# Altium PCB FSAEeBR-energy-meter.PcbDoc
Units mm, origin at the board's own origin, x right, y up, seen from the top; angles counter-clockwise.
Board outline 152.4 x 101.6 mm, 2 copper layers (Top Layer, Bottom Layer), stack 1.631 mm thick; 98 components, 74 nets, 420 pads, 3 vias.
Unrouted connection lines stored in the file: 241.
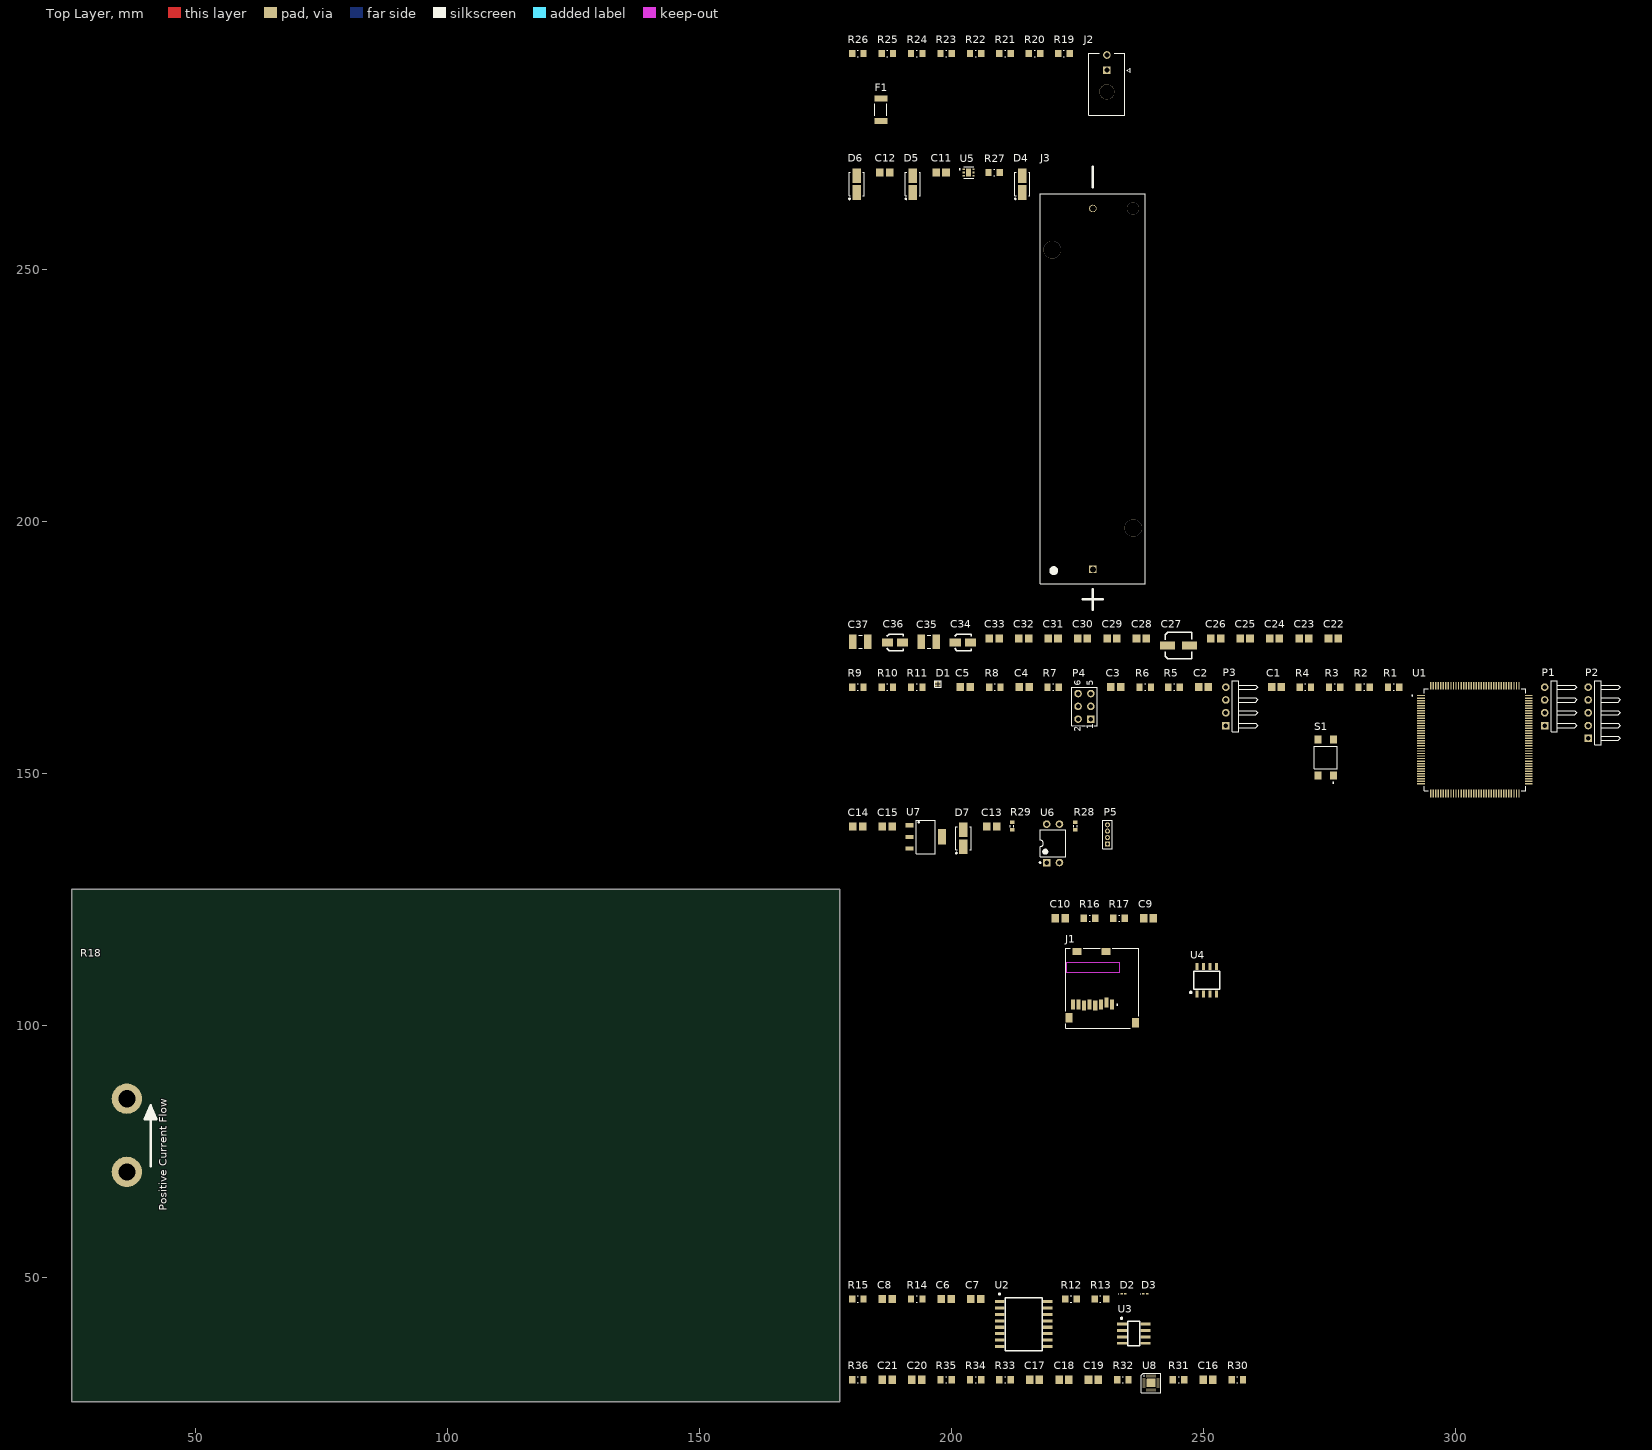
[diagram p0: Top Layer view]
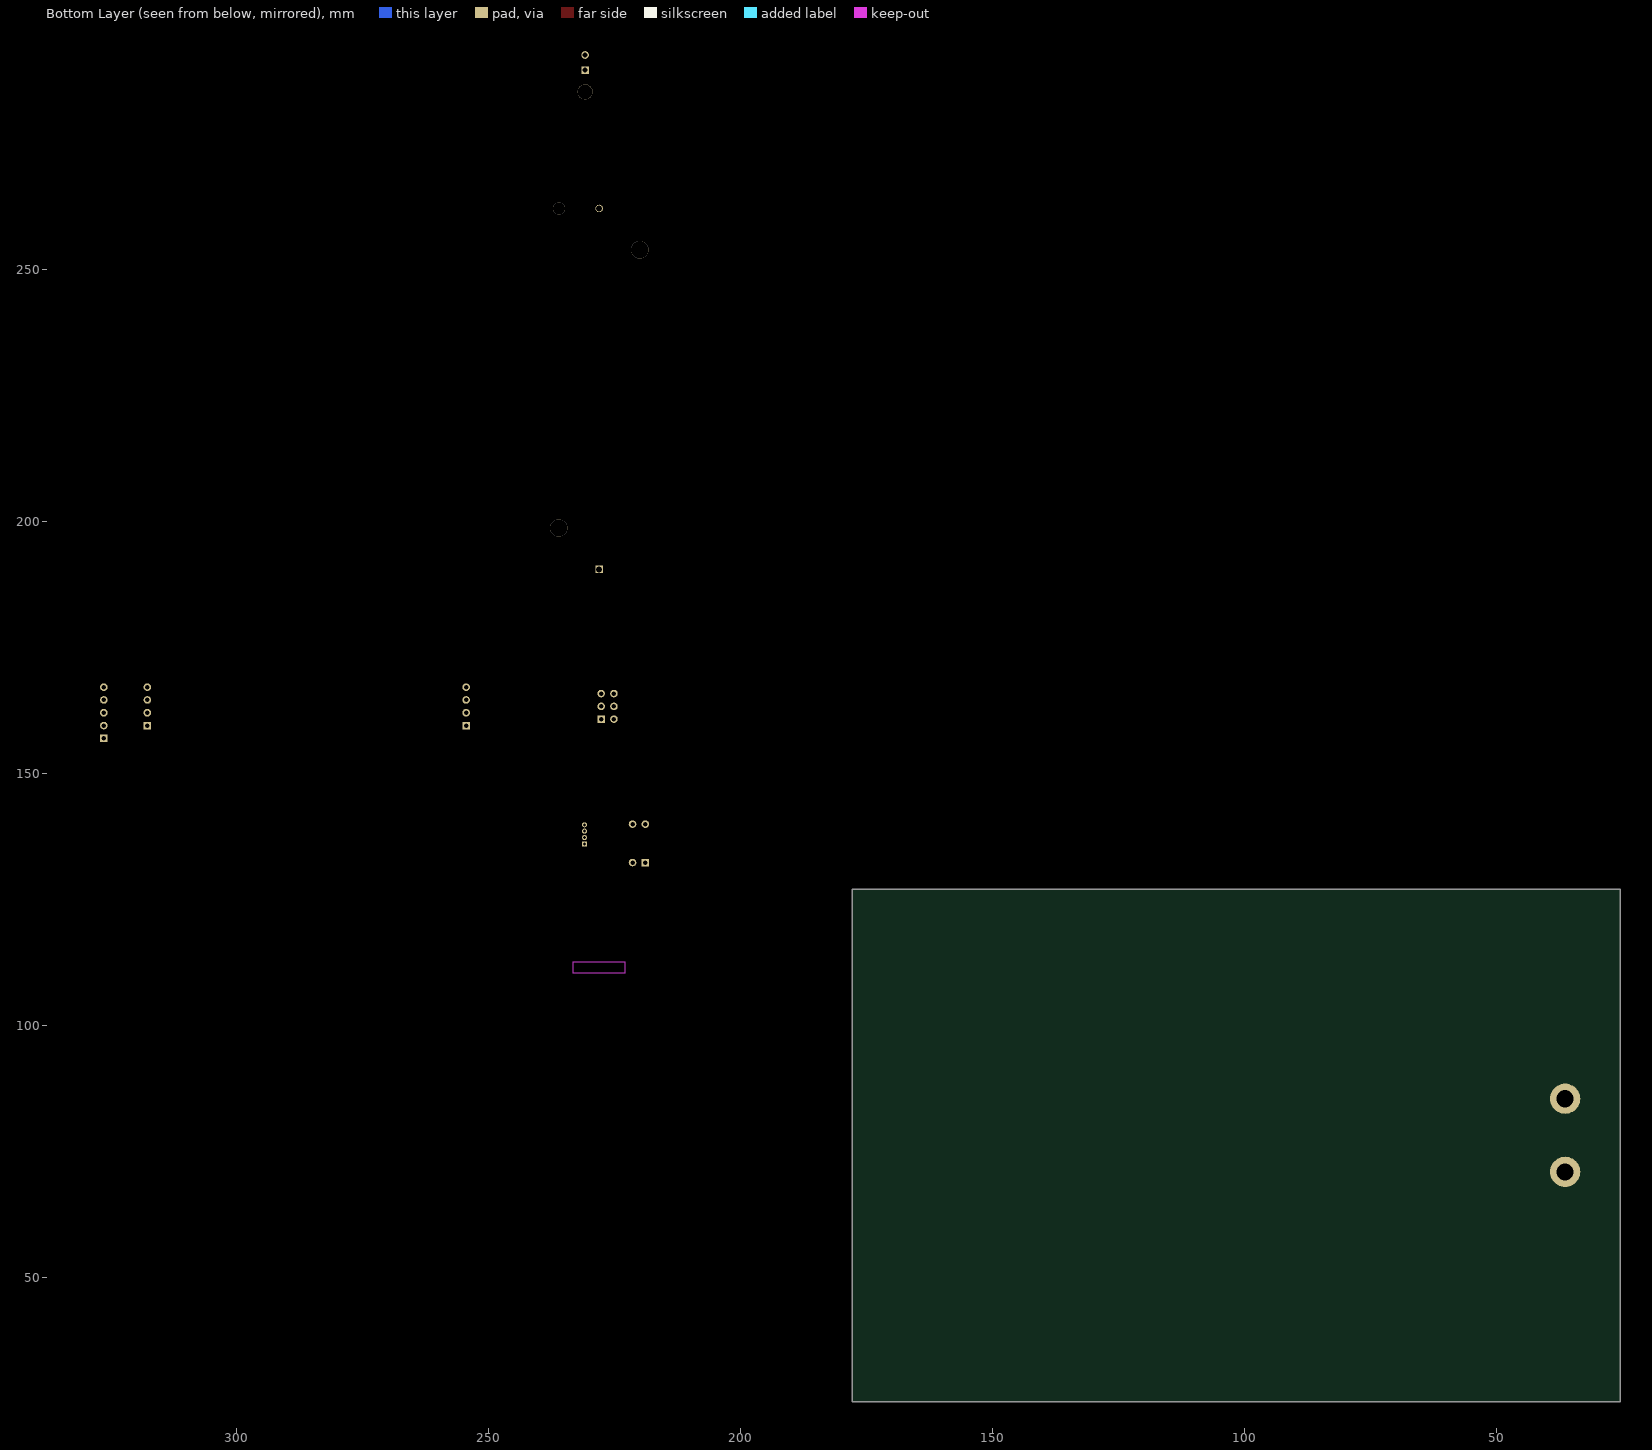
[diagram p1: Bottom Layer view, seen from below]

## Layer stack, top to bottom
Top Solder: solder mask 0.0102, Solder Resist, Dk 3.5
Top Layer: signal copper 0.0356
Dielectric 1: dielectric 1.56, FR-4, Dk 4.8
Bottom Layer: signal copper 0.0356
Bottom Solder: solder mask 0.0102, Solder Resist, Dk 3.5

## Board outline
25.4,25.4 177.8,25.4 177.8,127 25.4,127

## Design rules (kind name [scope] priority, off if disabled: settings)
Clearance [All] p1: gap=0.152 ignorepadtopadclearanceinfootprint=FALSE
PolygonConnect [All] p1: connectstyle=Relief reliefconductorwidth=0.254 reliefentries=4 polygonreliefangle="90 Angle" airgapwidth=0.254
RoomDefinition voltage_sensing [InComponentClass('voltage_sensing')] p1: confinementstyle=ConfineIn formatcopy=TRUE lockcomponents=FALSE outline 178.943,274.574 241.427,274.574 241.427,296.926 178.943,296.926
RoomDefinition power [InComponentClass('power')] p2: confinementstyle=ConfineIn formatcopy=TRUE lockcomponents=FALSE outline 178.943,182.118 238.76,182.118 238.76,273.304 178.943,273.304
RoomDefinition MCU_power_input [InComponentClass('MCU_power_input')] p3: confinementstyle=ConfineIn formatcopy=TRUE lockcomponents=FALSE outline 178.943,172.466 278.257,172.466 278.257,180.848 178.943,180.848
RoomDefinition MCU [InComponentClass('MCU')] p4: confinementstyle=ConfineIn formatcopy=TRUE lockcomponents=FALSE outline 178.943,144.78 332.867,144.78 332.867,171.196 178.943,171.196
RoomDefinition LV_power [InComponentClass('LV_power')] p5: confinementstyle=ConfineIn formatcopy=TRUE lockcomponents=FALSE outline 178.943,131.318 233.172,131.318 233.172,143.51 178.943,143.51
RoomDefinition log_storage [InComponentClass('log_storage')] p6: confinementstyle=ConfineIn formatcopy=TRUE lockcomponents=FALSE outline 219.075,97.282 269.984,97.282 269.984,125.349 219.075,125.349
RoomDefinition CAN_interface [InComponentClass('CAN_interface')] p7: confinementstyle=ConfineIn formatcopy=TRUE lockcomponents=FALSE outline 178.943,35.052 240.665,35.052 240.665,49.784 178.943,49.784
RoomDefinition ADC [InComponentClass('ADC')] p8: confinementstyle=ConfineIn formatcopy=TRUE lockcomponents=FALSE outline 178.943,25.781 259.207,25.781 259.207,33.782 178.943,33.782
RoutingVias [All] p1: holewidth=0.711 width=1.27 viastyle="Through Hole" minholewidth=0.711 minwidth=1.27 maxholewidth=0.711 maxwidth=1.27
SolderMaskExpansion [All] p1: expansion=0.102 istentingtop=FALSE
Width [All] p1: maxlimit=0.254 minlimit=0.254 preferedwidth=0.254
30 further rules are at their usual default settings.

## Classes and differential pairs
component class voltage_sensing: F1 F? J2 R19 R20 R21 R22 R23 R24 R25 R26
component class power: C11 C12 D4 D5 D6 J3 R27 U5
component class MCU: C1 C2 C3 C4 C5 D1 P1 P2 P3 P4 R1 R2 R3 R4 R5 R6 R7 R8 R9 R10 R11 S1 S? U1
component class MCU_power_input: C22 C23 C24 C25 C26 C27 C28 C29 C30 C31 C32 C33 C34 C35 C36 C37
component class LV_power: C13 C14 C15 D7 P5 R28 R29 U6 U7
component class log_storage: C9 C10 J1 R16 R17 U4
component class current_sensing: R18
component class CAN_interface: C6 C7 C8 D2 D3 R12 R13 R14 R15 U2 U3
component class ADC: C16 C17 C18 C19 C20 C21 R30 R31 R32 R33 R34 R35 R36 U8

## Components (designator, comment, footprint, x,y, rotation, side; value= is the part's Value field where it differs from the comment)
C1 "Cap" CAPC2012X09M 264.414,167.132 r0 top value=100pF
C2 "Cap" CAPC2012X09M 249.936,167.132 r0 top value=100pF
C3 "Cap" CAPC2012X09M 232.537,167.132 r0 top value=100pF
C4 "CAP CER 50v X7R 0805" CAPC2012X09M 214.376,167.132 r0 top value=.1uF
C5 "Cap" CAPC2012X09M 202.692,167.132 r0 top value=100pF
C6 "Cap" CAPC2012X09M 198.882,45.72 r0 top value=.22uF
C7 "Cap" CAPC2012X09M 204.724,45.72 r0 top value=.22uF
C8 "Cap" CAPC2012X09M 187.198,45.72 r0 top value=.22uF
C9 "Cap" CAPC2012X09M 239.014,121.285 r0 top value=.1uF
C10 "Cap" CAPC2012X09M 221.488,121.285 r0 top value=.1uF
C11 "Cap" CAPC2012X09M 197.866,269.24 r0 top value=1.2uF
C12 "Cap" CAPC2012X09M 186.69,269.24 r0 top value=1.2uF
C13 "Cap" CAPC2012X09M 207.899,139.446 r0 top value=100pF
C14 "Cap" CAPC2012X09M 181.356,139.446 r0 top value=1.2uF
C15 "Cap" CAPC2012X09M 187.198,139.446 r0 top value=1.2uF
C16 "Cap" CAPC2012X09M 250.825,29.718 r0 top value=100pF
C17 "Cap" CAPC2012X09M 216.408,29.718 r0 top value=100pF
C18 "Cap" CAPC2012X09M 222.25,29.718 r0 top value=.22uF
C19 "Cap" CAPC2012X09M 228.092,29.718 r0 top value=.22uF
C20 "Cap" CAPC2012X09M 193.04,29.718 r0 top value=.22uF
C21 "Cap" CAPC2012X09M 187.198,29.718 r0 top value=100pF
C22 "CAP CER 50v X7R 0805" CAPC2012X09M 275.717,176.784 r0 top value=.1uF
C23 "CAP CER 50v X7R 0805" CAPC2012X09M 269.875,176.784 r0 top value=.1uF
C24 "CAP CER 50v X7R 0805" CAPC2012X09M 264.033,176.784 r0 top value=.1uF
C25 "CAP CER 50v X7R 0805" CAPC2012X09M 258.191,176.784 r0 top value=.1uF
C26 "CAP CER 50v X7R 0805" CAPC2012X09M 252.349,176.784 r0 top value=.1uF
C27 "Cap Pol" CAPACITOR_5MM 244.983,175.387 r0 top value=4.7uF
C28 "CAP CER 50v X7R 0805" CAPC2012X09M 237.617,176.784 r0 top value=.1uF
C29 "CAP CER 50v X7R 0805" CAPC2012X09M 231.775,176.784 r0 top value=.1uF
C30 "CAP CER 50v X7R 0805" CAPC2012X09M 225.933,176.784 r0 top value=.1uF
C31 "CAP CER 50v X7R 0805" CAPC2012X09M 220.091,176.784 r0 top value=.1uF
C32 "CAP CER 50v X7R 0805" CAPC2012X09M 214.249,176.784 r0 top value=.1uF
C33 "CAP CER 50v X7R 0805" CAPC2012X09M 208.407,176.784 r0 top value=.1uF
C34 "Cap Pol" CAPACITOR_3MM 202.184,176.022 r0 top value=1uF
C35 "CAP CER 1kv X7R 1210" CAPC3225X25M 195.453,176.149 r0 top value=10nF
C36 "Cap Pol" CAPACITOR_3MM 188.722,176.022 r0 top value=1uF
C37 "CAP CER 1kv X7R 1210" CAPC3225X25M 181.864,176.149 r0 top value=10nF
D1 "RGB LED" SML-LX0303RGBC1TR 197.231,167.767 r0 top
D2 "LED" 0603 234.061,46.736 r0 top
D3 "LED" 0603 238.379,46.736 r0 top
D4 "DIODE SCHOTTKY 40V 2A SMA" DIOM4326X23M 213.995,266.954 r90 top
D5 "DIODE SCHOTTKY 40V 2A SMA" DIOM4326X23M 192.278,266.954 r90 top
D6 "DIODE SCHOTTKY 40V 2A SMA" DIOM4326X23M 181.102,266.954 r90 top
D7 "DIODE SCHOTTKY 40V 2A SMA" DIOM4326X23M 202.311,137.16 r90 top
F1 "FUSE" 12Z-2010 185.928,281.686 r90 top
J1 "MEM2061-01-188-00-A" GCT_MEM2061-01-188-00-A_REVA 229.817,107.365 r0 top
J2 "43045-0200" MOLEX_43045-0200 230.759,289.56 r0 top
J3 "1043P" CONN2_1043P_KEY 227.965,190.5 r90 top
P1 "Header 4H" HDR1X4H 317.627,159.512 r90 top
P2 "Header 5H" HDR1X5H 326.263,156.972 r90 top
P3 "Header 4H" HDR1X4H 254.381,159.512 r90 top
P4 "Header 3X2" HDR2X3 227.584,160.782 r90 top
P5 "MHDR1X4" MHDR1X4 230.886,136.017 r90 top
R1 "Res3" RESC2112X05M 287.655,167.132 r0 top value=1.00K
R2 "Res3" RESC2112X05M 281.813,167.132 r0 top value=1.00K
R3 "Res3" RESC2112X05M 275.971,167.132 r0 top value=4.75K
R4 "Res3" RESC2112X05M 270.129,167.132 r0 top value=4.75K
R5 "Res3" RESC2112X05M 244.094,167.132 r0 top value=1.00K
R6 "Res3" RESC2112X05M 238.379,167.132 r0 top value=1.00K
R7 "Res3" RESC2112X05M 220.091,167.132 r0 top value=10.0K
R8 "Res3" RESC2112X05M 208.534,167.132 r0 top value=10.0K
R9 "Res3" RESC2112X05M 181.356,167.132 r0 top value=1.00K
R10 "Res3" RESC2112X05M 187.198,167.132 r0 top value=1.00K
R11 "Res3" RESC2112X05M 193.04,167.132 r0 top value=1.00K
R12 "Res3" RESC2112X05M 223.647,45.72 r0 top value=1.00K
R13 "Res3" RESC2112X05M 229.489,45.72 r0 top value=1.00K
R14 "Res3" RESC2112X05M 193.04,45.72 r0 top value=10.0K
R15 "Res3" RESC2112X05M 181.356,45.72 r0 top value=10.0K
R16 "Res3" RESC2112X05M 227.33,121.285 r0 top value=10.0K
R17 "Res3" RESC2112X05M 233.172,121.285 r0 top value=10.0K
R18 "SH6918F500BHEP" SH6918F500BHEP 36.322,78.221 r90 top value=0.0001
R19 "Res3" RESC2112X05M 222.25,292.862 r0 top value=63.4K
R20 "Res3" RESC2112X05M 216.408,292.862 r0 top value=63.4K
R21 "Res3" RESC2112X05M 210.566,292.862 r0 top value=63.4K
R22 "Res3" RESC2112X05M 204.724,292.862 r0 top value=63.4K
R23 "Res3" RESC2112X05M 198.882,292.862 r0 top value=63.4K
R24 "Res3" RESC2112X05M 193.04,292.862 r0 top value=63.4K
R25 "Res3" RESC2112X05M 187.198,292.862 r0 top value=63.4K
R26 "Res3" RESC2112X05M 181.356,292.862 r0 top value=73.2R
R27 "Res3" RESC2112X05M 208.407,269.24 r0 top value=0.1
R28 "Res3" J1-0603 224.536,139.573 r90 top value=3.4k
R29 "Res3" J1-0603 211.963,139.573 r90 top value=3.4k
R30 "Res3" RESC2112X05M 256.667,29.718 r0 top value=10.0K
R31 "Res3" RESC2112X05M 244.983,29.718 r0 top value=10.0K
R32 "Res3" RESC2112X05M 233.934,29.718 r0 top value=10.0K
R33 "Res3" RESC2112X05M 210.566,29.718 r0 top value=10.0K
R34 "Res3" RESC2112X05M 204.724,29.718 r0 top value=10.0K
R35 "Res3" RESC2112X05M 198.882,29.718 r0 top value=10.0K
R36 "Res3" RESC2112X05M 181.356,29.718 r0 top value=10.0K
S1 "TL3305AF160QG" SW_TL3305AF160QG 274.193,153.162 r90 top
U1 "STM32F103ZCT6TR" QFP50P2200X2200X160-144N 303.784,156.718 r0 top
U2 "ISO7721FBDWR" DW0016B_N 214.249,40.767 r0 top
U3 "MCP2551T-I/SN" SOIC127P600X175-8N 236.093,38.862 r0 top
U4 "M95M02-DRMN6TP" SOIC8-1.27-5X4MM 250.571,108.966 r0 top
U5 "TLV75730PDRVR" VREG_TLV75730PDRVR 203.327,269.24 r0 top
U6 "Optoisolator1" DIP-4 220.091,136.144 r90 top
U7 "MCP1799T-5002H/DB" SOT223 194.818,137.414 r0 top
U8 "ADS131M03IRUKR" 20-WQFN 239.522,29.083 r0 top

## Footprints (in the part's own frame and the unit in brackets; to place one, negate y for a bottom-side part, rotate by r counter-clockwise, add the part's x,y. Pads: shape width x height; smd on the part's side, far side on the other; paste and mask are expansions set on the pad)
12Z-2010 [mm] "Chip Resistor, Body 5.0x2.5mm, IPC High Density"
  rect 1.2x2.6 smd: 1(-2.2,0) 2(2.2,0)
  silkscreen extent -1.2,-1.2 1.2,1.2, body extent -2.58,-1.33 2.58,1.33, height 0.9
20-WQFN [mm]
  rrect40% 0.6x0.2 smd mask+0.05: 1(-1.4,0.8) 2(-1.4,0.4) 3(-1.4,0) 4(-1.4,-0.4) 5(-1.4,-0.8) 11(1.4,-0.8) 12(1.4,-0.4) 13(1.4,0) 14(1.4,0.4) 15(1.4,0.8)
  rrect40% 0.2x0.6 smd mask+0.05: 6(-0.8,-1.4) 7(-0.4,-1.4) 8(0,-1.4) 9(0.4,-1.4) 10(0.8,-1.4) 16(0.8,1.4) 17(0.4,1.4) 18(0,1.4) 19(-0.4,1.4) 20(-0.8,1.4)
  rrect5% 1.7x1.7 smd mask+0.05: EXP(0,0)
  silkscreen extent -1.91,-1.91 1.91,1.91, body extent -1.55,-1.55 1.55,1.55, height 0.6
0603 [mm] "Chip Inductor, Body 0.6x0.3mm, IPC High Density"
  rect 0.5x0.3 smd: 1(-0.35,0) 2(0.35,0)
  silkscreen extent -0.9,-0.05 -0.9,0.05, body extent -0.33,-0.18 0.33,0.18, height 0.55
CAPACITOR_3MM [mm]
  rect 2.2x1.6 smd: 1(-1.5,0) 2(1.5,0)
  silkscreen extent -1.65,-1.65 1.65,1.65, body extent -2.6,-2.15 2.6,2.15, height 6.15
CAPACITOR_5MM [mm]
  rect 3x1.6 smd: 1(-2.2,0) 2(2.2,0)
  silkscreen extent -2.65,-2.65 2.65,2.65, body extent -3.1,-2.65 3.1,2.65, height 6.15
CAPC2012X09M [mm] "Chip Capacitor, 2-Leads, Body 2.00x1.25mm, IPC Low Density"
  rect 1.5x1.6 smd: 1(-0.975,0) 2(0.975,0)
  body extent -1.1,-0.72 1.1,0.72, height 0.88
CAPC3225X25M [mm] "Chip Capacitor, 2-Leads, Body 3.20x2.50mm, IPC Low Density"
  rect 1.5x2.8 smd: 1(-1.5,0) 2(1.5,0)
  silkscreen extent -0.35,-1.3 0.35,1.3, body extent -1.7,-1.35 1.7,1.35, height 2.5
CONN2_1043P_KEY [mm]
  rect 1.49x1.49 hole 1.19 mask+0: 1(0,0)
  round 1.49 hole 1.19 mask+0: 2(71.6,0)
  silkscreen extent -7.97,-10.45 79.85,10.45, body extent -2.62,-10.33 74.43,10.33, height 14.86
DIOM4326X23M [mm] "Molded Diode, 2-Leads, Body 4.30x2.60mm, IPC Low Density"
  rect 2.9x1.7 smd: 1(-1.675,0) 2(1.675,0)
  silkscreen extent -3.07,-1.5 2.3,1.52, body extent -2.74,-1.4 2.74,1.4, height 2.36
DIP-4 [mm] "DIP; 4 Leads; Row Spacing 7.62 mm; Pitch 2.54 mm"
  rect 1.5x1.5 hole 0.9: 1(-3.81,1.27)
  round 1.5 hole 0.9: 2(-3.81,-1.27) 3(3.81,-1.27) 4(3.81,1.27)
  silkscreen extent -3.93,-2.55 2.65,2.69, body extent -3.15,-2.5 3.15,2.5, height 5.6
DW0016B_N [mm]
  rect 1.9x0.6 smd paste+0 mask+0: 1(-4.75,4.445) 2(-4.75,3.175) 3(-4.75,1.905) 4(-4.75,0.635) 5(-4.75,-0.635) 6(-4.75,-1.905) 7(-4.75,-3.175) 8(-4.75,-4.445) 9(4.75,-4.445) 10(4.75,-3.175) 11(4.75,-1.905) 12(4.75,-0.635) 13(4.75,0.635) 14(4.75,1.905) 15(4.75,3.175) 16(4.75,4.445)
  silkscreen extent -4.86,-5.25 3.65,6.07, body extent -5.17,-5.15 5.17,5.15, height 2.59
GCT_MEM2061-01-188-00-A_REVA [mm]
  rect 0.8x2 smd: 1(1.94,-3.225) 2(0.84,-2.825) 3(-0.26,-3.225) 4(-1.36,-3.425) 5(-2.46,-3.225) 6(-3.56,-3.425) 7(-4.66,-3.225) 8(-5.76,-3.225)
  rect 1.8x1.4 smd: 9(-4.95,7.325) 10(0.75,7.325)
  rect 1.4x1.9 smd: GND(-6.55,-5.825) GND(6.6,-6.825)
  Keep-Out Layer region: 3.37,3.1 -7.011,3.1 -7.011,5.175 3.37,5.175
  silkscreen extent -7.24,-7.87 7.24,8, body extent -7.1,-7.7 7.1,7.75, height 1.9
HDR1X4H [mm] "Connector; Header; 4 Position; Right Angle"
  rect 1.5x1.5 hole 0.9: 1(0,0)
  round 1.5 hole 0.9: 2(2.54,0) 3(5.08,0) 4(7.62,0)
  silkscreen extent -1.27,-6.35 8.89,-1.27
HDR1X5H [mm] "Connector; Header; 5 Position; Right Angle"
  rect 1.5x1.5 hole 0.9: 1(0,0)
  round 1.5 hole 0.9: 2(2.54,0) 3(5.08,0) 4(7.62,0) 5(10.16,0)
  silkscreen extent -1.27,-6.35 11.43,-1.27
HDR2X3 [mm] "Connector; Header; 3x2 Position"
  rect 1.5x1.5 hole 0.9: 1(0,0)
  round 1.5 hole 0.9: 2(0,2.54) 3(2.54,0) 4(2.54,2.54) 5(5.08,0) 6(5.08,2.54)
  silkscreen extent -1.27,-1.27 6.35,3.81
J1-0603 [mm] "Chip Resistor, Body 1.6x0.8mm, IPC High Density"
  rect 0.7x0.9 smd: 1(-0.75,0) 2(0.75,0)
  silkscreen extent -0.2,-0.35 0.2,0.35, body extent -0.85,-0.48 0.85,0.48, height 0.9
MHDR1X4 [mm] "Connector; Header; 4 Position"
  rect 1x1 hole 0.6: 1(0,0)
  round 1 hole 0.6: 2(1.27,0) 3(2.54,0) 4(3.81,0)
  silkscreen extent -0.9,-0.9 4.71,0.9
MOLEX_43045-0200 [mm]
  rect 1.52x1.52 hole 1.02 mask+0.076: 1(0,0)
  round 1.52 hole 1.02 mask+0.076: 2(0,3)
  round 3 hole 3 unplated mask+0.076: ""(0,-4.32)
  silkscreen extent -3.57,-8.92 4.62,3.32, body extent -3.57,-8.89 3.57,3.35, height 8.78
QFP50P2200X2200X160-144N [mm]
  rrect25% 1.56x0.28 smd: 1(-10.68,8.75) 2(-10.68,8.25) 3(-10.68,7.75) 4(-10.68,7.25) 5(-10.68,6.75) 6(-10.68,6.25) 7(-10.68,5.75) 8(-10.68,5.25) 9(-10.68,4.75) 10(-10.68,4.25) 11(-10.68,3.75) 12(-10.68,3.25) 13(-10.68,2.75) 14(-10.68,2.25) 15(-10.68,1.75) 16(-10.68,1.25) 17(-10.68,0.75) 18(-10.68,0.25) 19(-10.68,-0.25) 20(-10.68,-0.75) 21(-10.68,-1.25) 22(-10.68,-1.75) 23(-10.68,-2.25) 24(-10.68,-2.75) 25(-10.68,-3.25) 26(-10.68,-3.75) 27(-10.68,-4.25) 28(-10.68,-4.75) 29(-10.68,-5.25) 30(-10.68,-5.75) 31(-10.68,-6.25) 32(-10.68,-6.75) 33(-10.68,-7.25) 34(-10.68,-7.75) 35(-10.68,-8.25) 36(-10.68,-8.75) 73(10.68,-8.75) 74(10.68,-8.25) 75(10.68,-7.75) 76(10.68,-7.25) 77(10.68,-6.75) 78(10.68,-6.25) 79(10.68,-5.75) 80(10.68,-5.25) 81(10.68,-4.75) 82(10.68,-4.25) 83(10.68,-3.75) 84(10.68,-3.25) 85(10.68,-2.75) 86(10.68,-2.25) 87(10.68,-1.75) 88(10.68,-1.25) 89(10.68,-0.75) 90(10.68,-0.25) 91(10.68,0.25) 92(10.68,0.75) 93(10.68,1.25) 94(10.68,1.75) 95(10.68,2.25) 96(10.68,2.75) 97(10.68,3.25) 98(10.68,3.75) 99(10.68,4.25) 100(10.68,4.75) 101(10.68,5.25) 102(10.68,5.75) 103(10.68,6.25) 104(10.68,6.75) 105(10.68,7.25) 106(10.68,7.75) 107(10.68,8.25) 108(10.68,8.75)
  rrect25% 0.28x1.56 smd: 37(-8.75,-10.68) 38(-8.25,-10.68) 39(-7.75,-10.68) 40(-7.25,-10.68) 41(-6.75,-10.68) 42(-6.25,-10.68) 43(-5.75,-10.68) 44(-5.25,-10.68) 45(-4.75,-10.68) 46(-4.25,-10.68) 47(-3.75,-10.68) 48(-3.25,-10.68) 49(-2.75,-10.68) 50(-2.25,-10.68) 51(-1.75,-10.68) 52(-1.25,-10.68) 53(-0.75,-10.68) 54(-0.25,-10.68) 55(0.25,-10.68) 56(0.75,-10.68) 57(1.25,-10.68) 58(1.75,-10.68) 59(2.25,-10.68) 60(2.75,-10.68) 61(3.25,-10.68) 62(3.75,-10.68) 63(4.25,-10.68) 64(4.75,-10.68) 65(5.25,-10.68) 66(5.75,-10.68) 67(6.25,-10.68) 68(6.75,-10.68) 69(7.25,-10.68) 70(7.75,-10.68) 71(8.25,-10.68) 72(8.75,-10.68) 109(8.75,10.68) 110(8.25,10.68) 111(7.75,10.68) 112(7.25,10.68) 113(6.75,10.68) 114(6.25,10.68) 115(5.75,10.68) 116(5.25,10.68) 117(4.75,10.68) 118(4.25,10.68) 119(3.75,10.68) 120(3.25,10.68) 121(2.75,10.68) 122(2.25,10.68) 123(1.75,10.68) 124(1.25,10.68) 125(0.75,10.68) 126(0.25,10.68) 127(-0.25,10.68) 128(-0.75,10.68) 129(-1.25,10.68) 130(-1.75,10.68) 131(-2.25,10.68) 132(-2.75,10.68) 133(-3.25,10.68) 134(-3.75,10.68) 135(-4.25,10.68) 136(-4.75,10.68) 137(-5.25,10.68) 138(-5.75,10.68) 139(-6.25,10.68) 140(-6.75,10.68) 141(-7.25,10.68) 142(-7.75,10.68) 143(-8.25,10.68) 144(-8.75,10.68)
  silkscreen extent -12.54,-10.1 10.1,10.1, body extent -10.95,-10.95 10.95,10.95, height 1.6
RESC2112X05M [mm] "Chip Resistor, 2-Leads, Body 2.05x1.25mm, IPC Low Density"
  rect 1.25x1.45 smd: 1(-1.125,0) 2(1.125,0)
  silkscreen extent -0.1,-0.63 0.1,0.63, body extent -1.1,-0.7 1.1,0.7, height 0.5
SH6918F500BHEP [mm] "Shunt 500A 0.0001ohm 25W"
  round 6 hole 3.4: 1(-7.25,0) 2(7.25,0)
  Bottom Layer pour cut-out: -34.5,9.5 -34.5,-9.5 34.5,-9.5 34.5,9.5
  silkscreen extent -6.1,-5.84 5.94,-3.56, body extent -34.5,-9 34.5,9
SML-LX0303RGBC1TR [mm] "RGM LED 4SMD"
  rect 0.45x0.45 smd mask+0.05: 1(0.325,0.325) 2(0.325,-0.325) 3(-0.325,-0.325) 4(-0.325,0.325)
  silkscreen extent -0.65,-0.65 0.65,0.65, body extent -0.4,-0.4 0.4,0.4, height 0.65
SOIC8-1.27-5X4MM [mm]
  rect 0.6x1.4 smd: 1(-1.905,-2.7) 2(-0.635,-2.7) 3(0.635,-2.7) 4(1.905,-2.7) 5(1.905,2.7) 6(0.635,2.7) 7(-0.635,2.7) 8(-1.905,2.7)
  silkscreen extent -3.32,-2.56 2.54,1.78, body extent -2.5,-3.1 2.5,3.1, height 1.76
SOIC127P600X175-8N [mil]
  rect 78x22 smd: 1(-93,75) 2(-93,25) 3(-93,-25) 4(-93,-75) 5(93,-75) 6(93,-25) 7(93,25) 8(93,75)
  silkscreen extent -101,-96 46,126, body extent -118,-96 118,96, height 69
SOT223 [mil]
  rect 63x33 smd: 1(-126,91) 2(-126,0) 3(-126,-91)
  rect 63x122 smd: 4(126,0)
  silkscreen extent -73,-132 73,132, body extent -138,-128 138,128, height 71
SW_TL3305AF160QG [mm]
  rect 1.6x1.4 smd: 1(-3.6,-1.5) 2(3.6,-1.5) 3(-3.6,1.5) 4(3.6,1.5)
  silkscreen extent -5.1,-2.25 2.25,2.25, body extent -3.75,-2.25 3.75,2.25, height 3.7
VREG_TLV75730PDRVR [mm]
  rrect5% 0.45x0.3 smd: 1(-0.975,0.65) 2(-0.975,0) 3(-0.975,-0.65) 4(0.975,-0.65) 5(0.975,0) 6(0.975,0.65)
  rect 1x1.6 smd paste-2: 7(0,0)
  silkscreen extent -1.87,-1.12 1,1.12, body extent -1,-1 1,1, height 0.8

## Part data
C1 C2 C3 C5 C13 C16 C17 C21: library part CAP-COG-100pF-500V-±5%, "CAP CER 100pF 500v COG 0805", MPN=C0805C101JCGACTU, Tolerance=±5%, Name=CAP-COG-100pF-500V-±5%, PN=399-5102-1-ND, Type=COG, URL=http://www.digikey.ca/product-detail/en/C0805C101JCGACTU/399-5102-1-ND, WV=500
C4 C22 C23 C24 C25 C26 C28 C29 C30 C31 C32 C33: library part CAP-X7R-.1uF-50V-±5%, MPN=C0805C104J5RACTU, Tolerance=±5%, Name=CAP-X7R-.1uF-50V-±5%, PN=399-1171-1-ND, Type=X7R, URL=http://www.digikey.ca/product-detail/en/C0805C104J5RACTU/399-1171-1-ND, WV=50
C6 C7 C8 C18 C19 C20: library part CAP-X7R-.22uF-50V-±10%, "CAP CER .22uF 50v X7R 0805", MPN=C0805C224K5RACTU, Tolerance=±10%, Name=CAP-X7R-.22uF-50V-±10%, PN=399-3491-1-ND, Type=X7R, URL=http://www.digikey.ca/product-detail/en/C0805C224K5RACTU/399-3491-1-ND, WV=50
C9 C10: library part CAP-X7R-.1uF-25V-±10%, "CAP CER .1uF 25v X7R 0805", MPN=C0805C104K3RACTU, Tolerance=±10%, Name=CAP-X7R-.1uF-25V-±10%, PN=399-1168-1-ND, Type=X7R, URL=http://www.digikey.ca/product-detail/en/C0805C104K3RACTU/399-1168-1-ND, WV=25
C11 C12 C14 C15: library part CAP-X7R-1.2uF-10V-±10%, "CAP CER 1.2uF 10v X7R 0805", MPN=C0805C125K8RACTU, Tolerance=±10%, Name=CAP-X7R-1.2uF-10V-±10%, PN=399-4928-1-ND, Type=X7R, URL=http://www.digikey.ca/product-detail/en/C0805C125K8RACTU/399-4928-1-ND, WV=10
C27: library part "Cap Polar-4.7uF-50V", "CAP 85C 4.7uF ±20% 50V WX Series Aluminum Electrolytic", Leakage Current=3, MPN=UWX1H4R7MCL1GB, Rated Ripple Current=20, Voltage=50V, Diameter=5, Name="Cap Polar-4.7uF-50V", PN=493-2134-1-ND, Tan Theta=0.12, URL=http://www.digikey.ca/product-detail/en/UWX1H4R7MCL1GB/493-2134-1-ND
C34 C36: library part "Cap Polar-1uF-50V", "CAP 85C 1uF ±20% 50V WX Series Aluminum Electrolytic", Leakage Current=3, MPN=UWX1H010MCL2GB, Rated Ripple Current=8, Voltage=50V, Diameter=3, Name="Cap Polar-1uF-50V", PN=493-2129-1-ND, Tan Theta=0.12, URL=http://www.digikey.ca/product-detail/en/UWX1H010MCL2GB/493-2129-1-ND
C35 C37: library part CAP-X7R-10000pF-1000V-±5%, MPN=C1210C103JDRACTU, Tolerance=±5%, Name=CAP-X7R-10000pF-1000V-±5%, PN=399-5106-1-ND, Type=X7R, URL=http://www.digikey.ca/product-detail/en/C1210C103JDRACTU/399-5106-1-ND, WV=1000
D1: library part SML-LX0303RGBC/1TR, MP=SML-LX0303RGBC/1TR
D4 D5 D6 D7: "Schottky Rectifier", MPN=B240A-13-F, PN=B240A-FDICT-ND, URL=http://www.digikey.ca/product-detail/en/B240A-13-F/B240A-FDICT-ND
J1: library part MEM2061-01-188-00-A_REVA, "10 _8 + 2_ Position Card Connector microSDâ„¢ Surface Mount, Right Angle Gold", Package=None, Availability=Unavailable, MF="Global Connector Technology", MP=MEM2061-01-188-00-A, Price=None, SnapEDA_Link=https://www.snapeda.com/parts/MEM2061-01-188-00-A/Global%20Connector%20Technology/view-part/779219/?ref=snap
J2: "Connector Header Through Hole, Right Angle 2 position -", Package=None, Check_prices=https://www.snapeda.com/parts/43045-0200/Molex/view-part/?ref=eda, Digi-Key_Part_Number=WM1813-ND, MF=Molex, MP=43045-0200, Purchase-URL=https://pricing.snapeda.com/search/part/43045-0200/?ref=eda, SnapEDA_Link=https://www.snapeda.com/parts/43045-0200/Molex/view-part/?ref=snap
J3: "No Description Available", Mfr_Name="Keystone Electronics", Copyright="Copyright (C) 2022 Ultra Librarian. All rights reserved.", Digi-Key_Part_Number_1=36-1043P-ND, Manufacturer_Part_Number=1043P, RefDes=RefDes, Type=DEV
P1 P3: "Header, 4-Pin, Right Angle", LatestRevisionDate=17-Jul-2002, LatestRevisionNote="Re-released for DXP Platform.", Publisher="Altium Limited"
P2: "Header, 5-Pin, Right Angle", LatestRevisionDate=17-Jul-2002, LatestRevisionNote="Re-released for DXP Platform.", Publisher="Altium Limited"
P4: "Header, 3-Pin, Dual row", LatestRevisionDate=17-Jul-2002, LatestRevisionNote="Re-released for DXP Platform.", Publisher="Altium Limited"
P5: "Header, 4-Pin", LatestRevisionDate=17-Jul-2002, LatestRevisionNote="Re-released for DXP Platform.", Publisher="Altium Limited"
R1 R2 R5 R6 R9 R10 R11 R12 R13: library part Resistor_1.00K, "RES SMD 1.00K OHM 1% 1/8W 0805", MPN=CRCW08051K00FKEA, Name=Resistor_1.00K, PN=541-1.00KCCT-ND, URL=http://www.digikey.ca/product-detail/en/CRCW08051K00FKEA/541-1.00KCCT-ND
R3 R4: library part Resistor_4.75K, "RES SMD 4.75K OHM 1% 1/8W 0805", MPN=CRCW08054K75FKEA, Name=Resistor_4.75K, PN=541-4.75KCCT-ND, URL=http://www.digikey.ca/product-detail/en/CRCW08054K75FKEA/541-4.75KCCT-ND
R7 R8 R14 R15 R16 R17 R30 R31 R32 R33 R34 R35 R36: library part Resistor_10.0K, "RES SMD 10.0K OHM 1% 1/8W 0805", MPN=CRCW080510K0FKEA, Name=Resistor_10.0K, PN=541-10.0KCCT-ND, URL=http://www.digikey.ca/product-detail/en/CRCW080510K0FKEA/541-10.0KCCT-ND
R18: library part Res2, "Shunt 500A 0.0001ohm 25W", LatestRevisionDate=17-Jul-2002, LatestRevisionNote="Re-released for DXP Platform.", PackageDescription="Axial Device, Thru-Hole; 2 Leads; 0.4 in Pin Spacing", PackageReference=AXIAL-0.4, Published=8-Jun-2000, Publisher="Altium Limited"
R19 R20 R21 R22 R23 R24 R25: library part Resistor_63.4K, "RES SMD 63.4K OHM 1% 1/8W 0805", MPN=CRCW080563K4FKEA, Name=Resistor_63.4K, PN=541-63.4KCCT-ND, URL=http://www.digikey.ca/product-detail/en/CRCW080563K4FKEA/541-63.4KCCT-ND
R26: library part Resistor_73.2R, "RES SMD 73.2R OHM 1% 1/8W 0805", MPN=CRCW080573R2FKEA, Name=Resistor_73.2R, PN=541-73.2CCT-ND, URL=http://www.digikey.ca/product-detail/en/CRCW080573R2FKEA/541-73.2CCT-ND
R27: library part Resistor_0R_Jumper, "RES SMD 0.1 OHM 5% 1/8W 0805", MPN=CRCW08050000Z0EA, Name=Resistor_0R_Jumper, PN=541-0.0ACT-ND, URL=http://www.digikey.ca/product-detail/en/CRCW08050000Z0EA/541-0.0ACT-ND
R28 R29: "Resistor", LatestRevisionDate=29-May-2009, LatestRevisionNote="IPC-7351 Footprint Added.", PackageDescription="Chip Resistor", PackageReference=J1-0603, Published=8-Jun-2000, Publisher="Altium Limited"
S1: "Tactile Switch SPST-NO Top Actuated Surface Mount", Package=None, Availability="In Stock", Check_prices=https://www.snapeda.com/parts/TL3305AF160QG/E-Switch/view-part/?ref=eda, MF=E-Switch, MP=TL3305AF160QG, Price=None, Purchase-URL=https://pricing.snapeda.com/search/part/TL3305AF160QG/?ref=eda, SnapEDA_Link=https://www.snapeda.com/parts/TL3305AF160QG/E-Switch/view-part/?ref=snap
U1: "ARM® Cortex®-M3 series Microcontroller IC 32-Bit Single-Core 72MHz 256KB (256K x 8) FLASH 144-LQFP (20x20)", Package="LQFP-144 STMicroelectronics", Check_prices=https://www.snapeda.com/parts/STM32F103ZCT6TR/STMicroelectronics/view-part/?ref=eda, Digi-Key_Part_Number=497-18761-2-ND, MF=STMicroelectronics, MP=STM32F103ZCT6TR, Purchase-URL=https://pricing.snapeda.com/search/part/STM32F103ZCT6TR/?ref=eda, SnapEDA_Link=https://www.snapeda.com/parts/STM32F103ZCT6TR/STMicroelectronics/view-part/?ref=snap
U2: "Digital Isolador", Mfr_Name="Texas Instruments", Copyright="Copyright (C) 2022 Ultra Librarian. All rights reserved.", Digi-Key_Part_Number_1=296-ISO7721FBDWRTR-ND, Digi-Key_Part_Number_2=296-ISO7721FBDWRCT-ND, Digi-Key_Part_Number_3=296-ISO7721FBDWRDKR-ND, Manufacturer_Part_Number=ISO7721FBDWR, RefDes=RefDes, Type=DEV
U3: "1/1 Transceiver Half CANbus 8-SOIC", Package="SO-8 Microchip", Availability=Unavailable, MF=Microchip, MP=MCP2551T-I/SN, Price=None, SnapEDA_Link=https://www.snapeda.com/parts/MCP2551T-I/SN/Microchip/view-part/1037590/?ref=snap
U4: library part MCU-M95M02-DRMN6TP(SOIC8), "EEPROM Memory IC 2Mb _256K x 8_ SPI 5MHz 8-SO", Package="SOIC-8 STMicroelectronics", Availability=Unavailable, MF=STMicroelectronics, MP=M95M02-DRMN6TP, Price=None, SnapEDA_Link=https://www.snapeda.com/parts/M95M02-DRMN6TP/STMicroelectronics/view-part/105756/?ref=snap
U5: "1-A, low-IQ, high-accuracy, low-dropout voltage regulator with enable", Package="WSON-6 Texas Instruments", Check_prices=https://www.snapeda.com/parts/TLV75730PDRVR/Texas+Instruments/view-part/?ref=eda, Digi-Key_Part_Number=296-50008-2-ND, MF="Texas Instruments", MP=TLV75730PDRVR, Purchase-URL=https://pricing.snapeda.com/search/part/TLV75730PDRVR/?ref=eda, SnapEDA_Link=https://www.snapeda.com/parts/TLV75730PDRVR/Texas+Instruments/view-part/?ref=snap
U6: "4-Pin Phototransistor Optocoupler", DatasheetVersion=Nov-2003, LatestRevisionDate=04-Mar-2005, LatestRevisionNote="Sch pins 3 & 4 Swapped.", PackageReference=DIP-4, Published=24-Mar-1999, Publisher="Altium Limited"
U7: library part LM1117IMP-5.0, "LDO 5V 80mA SOT-223", Package="SOT-223 Texas Instruments", Availability=Bad, Check_prices=https://www.snapeda.com/parts/LM1117IMP-5.0/Texas%20Instruments/view-part/4449502/?ref=eda, MF="Texas Instruments", MP=LM1117IMP-5.0, Price=None, Purchase-URL=https://pricing.snapeda.com/search/part/LM1117IMP-5.0/?ref=eda, SnapEDA_Link=https://www.snapeda.com/parts/LM1117IMP-5.0/Texas%20Instruments/view-part/4449502/?ref=snap
U8: "3-Channel, Simultaneously-Sampling, 24-Bit, Delta-Sigma ADC"

## Via types
v1: diameter 3.45, hole 3.45, Top Layer to Bottom Layer, 2 vias
v2: diameter 2.39, hole 2.39, Top Layer to Bottom Layer, 1 vias

## Nets (pads, with @x,y where several pads share a name; then routed paths per layer and width w, separated by ;. In a path a pad name is that pad's centre, name@x,y a point inside that pad or via, vN(x,y) a via of type N, cw(c..) or ccw(c..) an arc to the next point about the centre after c; other vN are vias at no path point)
3V_REG: C6.1 C9.2 C10.2 C12.2 C18.1 C19.1 C22.2 C23.2 C24.2 C25.2 C26.2 C27.1 C28.2 C29.2 C30.2 C31.2 C32.2 C33.2 C34.1 C35.2 C36.1 C37.2 D1.1 D2.2 D3.2 J1.4 P1.2 P2.3 P3.2 P4.1 R3.1 R4.1 R16.1 R17.1 U1.17 U1.32 U1.33 U1.39 U1.52 U1.62 U1.72 U1.84 U1.95 U1.108 U1.121 U1.131 U1.144 U2.3 U4.8 U5.1 U8.18 U8.19
CAN_H: P5.3 R14.1 U3.7
CAN_L: P5.4 R14.2 U3.6
CAN_Rx: R13.1 U1.103 U2.4
CAN_Tx: R12.1 U1.104 U2.5
E\E\P\R\O\M\_\C\S\: U1.74 U4.1
GND: C1.1 C2.1 C3.1 C4.1 C5.1 C6.2 C9.1 C10.1 C11.1 C12.1 C13.1 C18.2 C19.2 C20.2 C22.1 C23.1 C24.1 C25.1 C26.1 C27.2 C28.1 C29.1 C30.1 C31.1 C32.1 C33.1 C34.2 C35.1 C36.2 C37.1 J1.6 J1.GND J3.2 P1.1 P2.1 P3.1 P4.2 R8.1 R29.1 R34.1 S1.3 S1.4 U1.16 U1.30 U1.31 U1.38 U1.51 U1.61 U1.71 U1.83 U1.94 U1.107 U1.120 U1.130 U1.143 U2.1 U2.7 U4.4 U5.3 U5.7 U8.17 U8.20 U8.EXP
GPIO1: C1.2 P2.2 U1.27
GPIO2: C2.2 P2.4 U1.28
GPIO3: C3.2 P2.5 U1.29
I2C2_SCL: R1.1 U1.69
I2C2_SDA: R2.1 U1.70
LED_B: R9.1 U1.96
LED_G: R10.1 U1.97
LED_R: R11.1 U1.98
LV_5V_REG: C7.2 C8.1 C15.2 U2.14 U3.3 U7.3
LV_GND: C7.1 C8.2 C14.1 C15.1 P5.1 R15.1 U2.9 U2.16 U3.2 U6.2 U7.2 U7.4
MISO: U1.134 U4.2 U8.13
MOSI: J1.3 U1.135 U4.5 U8.14
NetC14_2: C14.2 D7.1 U7.1
NetC16_1: C16.1 R31.2 U8.2
NetC16_2: C16.2 R30.2 U8.1
NetC17_1: C17.1 R33.2 U8.4
NetC17_2: C17.2 R32.2 U8.3
NetC20_1: C20.1 U8.16
NetC21_1: C21.1 R36.2 U8.6
NetC21_2: C21.2 R35.2 U8.5
NetD1_2: D1.2 R11.2
NetD1_3: D1.3 R10.2
NetD1_4: D1.4 R9.2
NetD2_2: D2.1 R12.2
NetD3_2: D3.1 R13.2
NetD4_1: D4.1 R27.2 R35.1
NetD4_2: D4.2 J3.1
NetD5_1: D5.1 D6.1 U5.4
NetD6_2: D6.2 U1.43
NetD7_2: D7.2 P5.2 R28.2
NetF1_1: F1.1 J2.1 J2.2
NetF1_2: F1.2 R19.2
NetP1_3: P1.3 R1.2 R3.2
NetP1_4: P1.4 R2.2 R4.2
NetP3_3: P3.3 R5.2
NetP3_4: P3.4 R6.2
NetR15_2: R15.2 U3.8
NetR16_2: R16.2 U4.7
NetR17_2: R17.2 U4.3
NetR18_1: R18.1 R30.1
NetR18_2: R18.2 R26.1 R31.1 R33.1
NetR19_1: R19.1 R20.2
NetR20_1: R20.1 R21.2
NetR21_1: R21.1 R22.2
NetR22_1: R22.1 R23.2
NetR23_1: R23.1 R24.2
NetR24_1: R24.1 R25.2
NetR25_1: R25.1 R26.2 R32.1
NetR28_1: R28.1 U6.1
NetR34_2: R34.2 U1.140 U8.15
NetU1_35: U1.35 U8.11
NetU1_41: U1.41 U8.9
NetU1_76: U1.76 U8.10
NetU1_133: U1.133 U8.12
NetU2_12: U2.12 U3.1
NetU2_13: U2.13 U3.4
PWR_EN: C13.2 D5.2 R29.2 U1.42 U6.3
RST: C4.2 S1.1 S1.2 U1.25
S\D\_\C\S\: J1.2 U1.75
SCLK: J1.5 U4.6
SD_CD: J1.9 U1.36
SWCLK: P4.6 U1.109
SWDIO: P4.4 U1.105
USART1_Rx: P4.5 R6.1 U1.102
USART1_Tx: P4.3 R5.1 U1.101
V_BAT: C11.2 R7.2 R27.1 R36.1 U1.6 U5.6 U6.4
V_BAT_ADC: C5.2 R7.1 R8.2 U1.26
pads on no net: J1.1 J1.7 J1.8 J1.10 J2. U1.1 U1.2 U1.3 U1.4 U1.5 U1.7 U1.8 U1.9 U1.10 U1.11 U1.12 U1.13 U1.14 U1.15 U1.18 U1.19 U1.20 U1.21 U1.22 U1.23 U1.24 U1.34 U1.37 U1.40 U1.44 U1.45 U1.46 U1.47 U1.48 U1.49 U1.50 U1.53 U1.54 U1.55 U1.56 U1.57 U1.58 U1.59 U1.60 U1.63 U1.64 U1.65 U1.66 U1.67 U1.68 U1.73 U1.77 U1.78 U1.79 U1.80 U1.81 U1.82 U1.85 U1.86 U1.87 U1.88 U1.89 U1.90 U1.91 U1.92 U1.93 U1.99 U1.100 U1.106 U1.110 U1.111 U1.112 U1.113 U1.114 U1.115 U1.116 U1.117 U1.118 U1.119 U1.122 U1.123 U1.124 U1.125 U1.126 U1.127 U1.128 U1.129 U1.132 U1.136 U1.137 U1.138 U1.139 U1.141 U1.142 U2.2 U2.6 U2.8 U2.10 U2.11 U2.15 U3.5 U5.2 U5.5 U8.7 U8.8
copper on no net:
  other v1: 235.965,198.7 219.965,253.9
  other v2: 235.965,262.1

## Text inside footprints (layer, text, board x,y; h text height)
J2: Mechanical 13 "MAX" at 227.439,275.78 h1.02; Mechanical 13 "PCB EDGE" at 234.759,275.08 h0.81
P4: Top Overlay "6" at 225.552,167.386 h1.27 r90; Top Overlay "5" at 228.092,167.386 h1.27 r90; Top Overlay "2" at 225.552,158.242 h1.27 r90; Top Overlay "1" at 228.092,158.75 h1.27 r90
R18: Top Overlay "Positive Current Flow" at 44.196,63.235 h1.52 r90